# Altium PCB power1.pcbdoc
Units mm, origin at the board's own origin, x right, y up, seen from the top; angles counter-clockwise.
Board outline 82.27 x 51.69 mm, 2 copper layers (Top Layer, Bottom Layer); 6 components, 3 nets, 25 pads, 0 vias.
Unrouted connection lines stored in the file: 8.
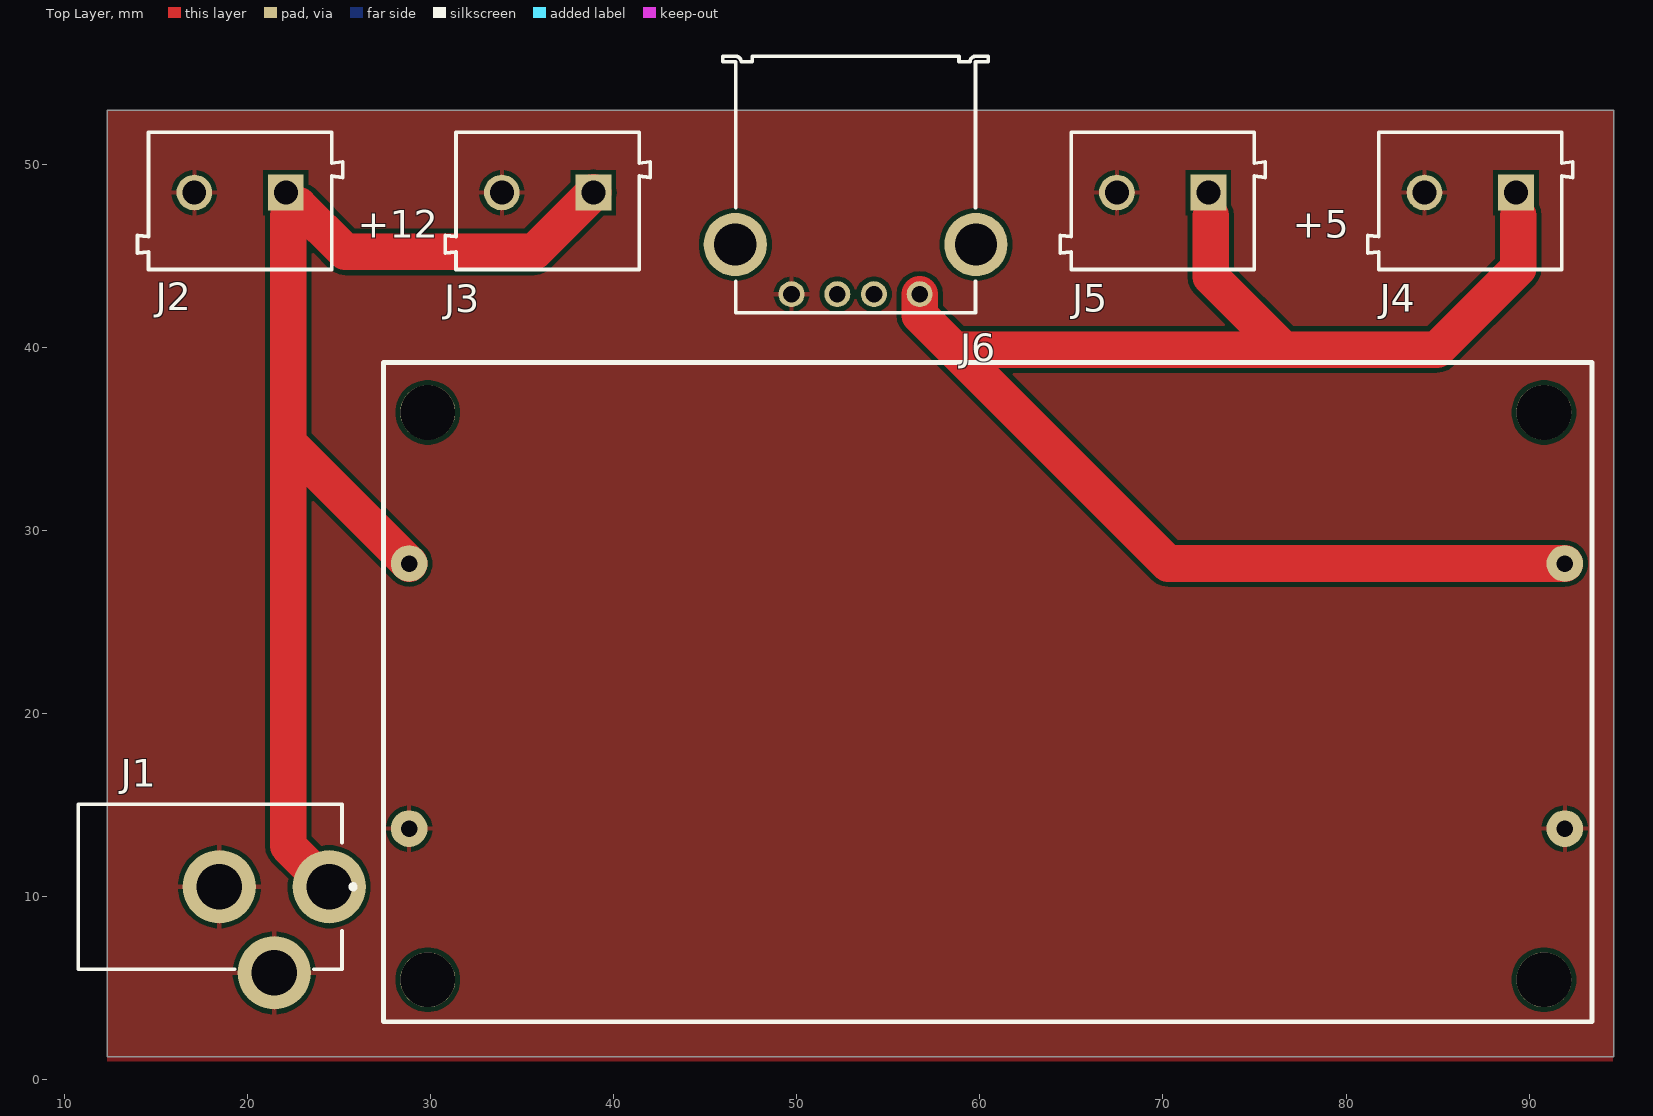
[diagram p0: Top Layer view]
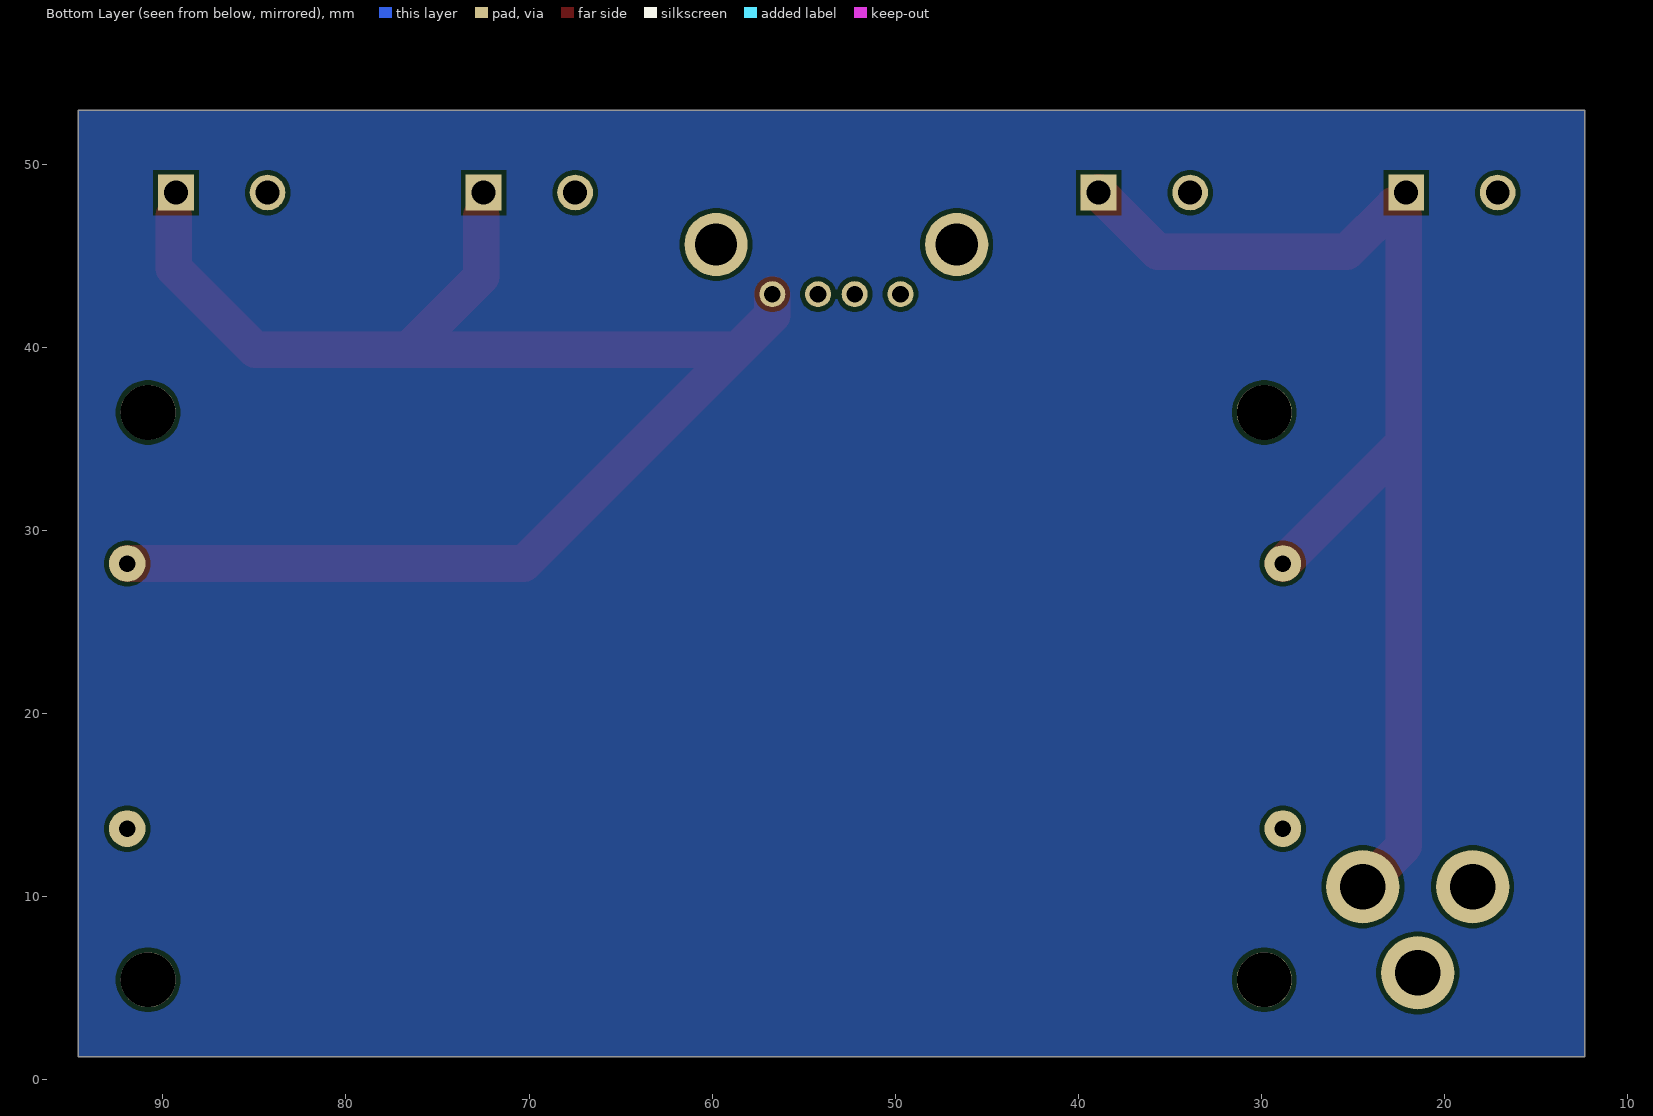
[diagram p1: Bottom Layer view, seen from below]
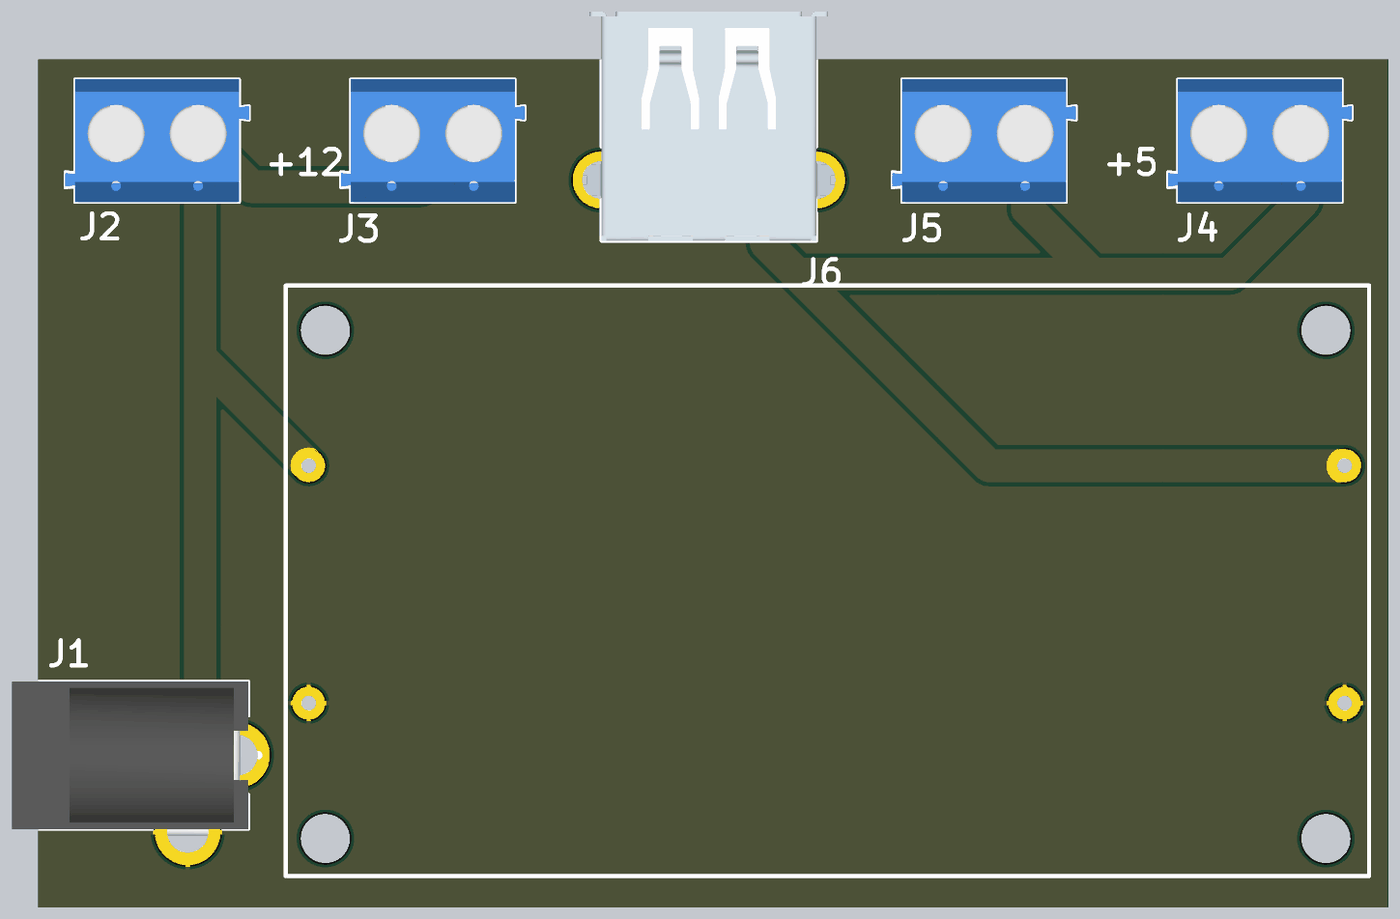
[diagram p2: 3D render of the assembled board from above, using the file's embedded part models]

## Layer stack, top to bottom
Top Solder: solder mask 0.0102, Solder Resist, Dk 3.5
Top Layer: signal copper 0.0356
Dielectric1: dielectric 0.32, FR-4, Dk 4.8
Bottom Layer: signal copper 0.0356
Bottom Solder: solder mask 0.0102, Solder Resist, Dk 3.5

## Board outline
12.349,52.959 94.615,52.959 94.615,1.27 12.349,1.27

## Design rules (kind name [scope] priority, off if disabled: settings)
Clearance [All] p1: gap=0.254 ignorepadtopadclearanceinfootprint=FALSE except(0: Arc-Hole Track-Hole SMDPad-Hole THPad-Hole Via-Hole Fill-Hole Poly-Hole Region-Hole Text-Hole)
PolygonConnect [All] p1: connectstyle=Relief reliefconductorwidth=0.254 reliefentries=4 polygonreliefangle="90 Angle" airgapwidth=0.254
RoutingVias [All] p1: holewidth=0.711 width=1.27 viastyle="Through Hole" minholewidth=0.711 minwidth=1.27 maxholewidth=0.711 maxwidth=1.27
SolderMaskExpansion [All] p1: expansion=0.102 istentingtop=FALSE
Width [All] p1: maxlimit=0.254 minlimit=0.254 preferedwidth=0.254
30 further rules are at their usual default settings.

## Components (designator, comment, footprint, x,y, rotation, side; value= is the part's Value field where it differs from the comment)
J1 "PJ-002A" CUI-PJ-002A_V 21.463,10.541 r180 top
J2 "691102710002" 691102710002 19.598,48.006 r180 top
J3 "691102710002" 691102710002 36.394,48.006 r180 top
J4 "691102710002" 691102710002 86.781,48.006 r180 top
J5 "691102710002" 691102710002 69.985,48.006 r180 top
J6 "61400416021" 61400416021 53.213,48.895 r180 top

## Footprints (in the part's own frame and the unit in brackets; to place one, negate y for a bottom-side part, rotate by r counter-clockwise, add the part's x,y. Pads: shape width x height; smd on the part's side, far side on the other; paste and mask are expansions set on the pad)
61400416021 [mm] "USB 2.0 Type A Horizontal"
  round 1.42 hole 0.92: 1(-3.5,5.99) 2(-1,5.99) 3(1,5.99) 4(3.5,5.99)
  round 3.45 hole 2.3: Shell(-6.57,3.28) Shell(6.57,3.28)
  silkscreen extent -7.25,-7 7.25,7, body extent -8,-7 8,7, height 7.63
691102710002 [mm] "5,00mm - modular - blue - Horizontal entry with pressure clamp - 9,9 mm height - 02p"
  rect 1.95x1.95 hole 1.3: 1(-2.5,-0.45)
  round 1.95 hole 1.3: 2(2.5,-0.45)
  silkscreen extent -5.6,-3.75 5.6,3.75, body extent -5.6,-3.75 5.6,3.75, height 9.96
CUI-PJ-002A_V [mm] "THD, 3-Leads, Body 14.4x9mm, Height 11mm"
  round 4 hole 2.5: 1(-3,0) 2(3,0) 3(0,4.7)
  silkscreen extent -4.43,-4.5 10.7,4.5, body extent -3.7,-4.5 10.7,4.9, height 11

## Part data
J1: library part CMP-2000-06895-2, "Through Hole Right Angle DC Power Jack, 2.5 A, 2 mm Center Pin, 3 Position, -25 to 85 degC, RoHS, Bulk", Current Rating=2.5A, Flammability Rating=UL94V-0, Insulation Resistance=50MOhms, Manufacturer=CUIInc., Operating Temperature Range=-25Cto+85C, Package Description="3-Pin Through Hole Device, Body 14.4 x 9 mm, Height 11 mm", Voltage Rating=24V, Brand=CUI, Connector Type=DCPowerJack, Contact Gender=Male, Contact Material=Copper, Contact Plating=Nickel, Datasheet URL=http://www.cui.com/product/resource/pj-002a.pdf, Datasheet Version="Rev. 1.03, 04/2016", Factory Pack Quantity=500, Housing Material=PolybutyleneTerephthalate(PBT), Inside Contact Diameter=2mm, Manufacturer URL=http://www.cui.com/, Mounting Angle=Right, Mounting Style=ThroughHole, Mounting Technology=ThroughHole, Outside Contact Diameter=6.5mm, Package Reference=PJ-002A, Product=Jacks, Product Category=DCPowerConnectors, RoHS=True, Termination Style=ThroughHole
J2 J3 J4 J5: library part CMP-1502-03258-1, "Series 102 - 5.00 mm Horizontal Entry Modular with Pressure Clamp WR-TBL, 2 pin", Manufacturer="Wurth Elektronik", Operating temperature=-40to105degC, Datasheet URL=http://katalog.we-online.de/em/datasheet/6911027100xx.pdf, Manufacturer URL=http://www.we-online.de, Mounting Technology=THT, Package Reference=691102710002, Packaging=Box, Part Number=691102710002, Pin Number=2, Pitch=5.00mm, Publisher=WurthElektronik
J6: library part CMP-1502-03227-1, "USB 2.0 Type A Receptacle WR-COM, Horizontal, THT", Contact Resistance=20mOhm, Manufacturer="Wurth Elektronik", Operating temperature=-40to105degC, Rated Current=1.5A, Working Voltage=30VAC, Connector Type=USB2.0TypeA, Datasheet URL=https://katalog.we-online.de/em/datasheet/61400416021.pdf, Gender=Receptacle, Manufacturer URL=http://www.we-online.de, Mounting Technology=THT, Orientation=Horizontal, Package Reference=61400416021, Packaging=Tray, Part Number=61400416021, Publisher=WurthElektronik

## Free pads (board coordinates)
  round 2 hole 0.9 unplated: ""(28.829,13.716) ""(28.829,28.194) ""(91.948,13.716) ""(91.948,28.194)
  round 3 hole 3 unplated: ""(29.845,5.461) ""(29.845,36.449) ""(90.805,5.461) ""(90.805,36.449)

## Nets (pads, with @x,y where several pads share a name; then routed paths per layer and width w, separated by ;. In a path a pad name is that pad's centre, name@x,y a point inside that pad or via, vN(x,y) a via of type N, cw(c..) or ccw(c..) an arc to the next point about the centre after c; other vN are vias at no path point)
+5: J4.1 J5.1 J6.1 pad.@91.948,28.194 | length 86.5
  Top Layer w2: J6.1 56.713,41.762 58.597,39.878 ; 72.612,47.186 72.612,43.847 76.581,39.878 ; 89.408,47.186 89.408,44.323 84.963,39.878 76.581,39.878 ; pad.@91.948,28.194 70.281,28.194 58.597,39.878 ; 58.597,39.878 76.581,39.878
+12: J1.1 J2.1 J3.1 pad.@28.829,28.194 | length 66.4
  Top Layer w0.254: J2.1 J2.1@22.796,47.758
  Top Layer w2: 22.225,47.186 22.225,34.798 ; J2.1@22.796,47.758 25.342,45.212 35.65,45.212 J3.1 ; J1.1 22.225,12.779 22.225,34.798 ; pad.@28.829,28.194 22.225,34.798
GND: J1.2 J1.3 J2.2 J3.2 J4.2 J5.2 J6.4 pad.@28.829,13.716 pad.@91.948,13.716
pads on no net: J6.2 J6.3 J6.Shell

## Polygon pours and split planes (outlines as drawn)
no net on Bottom Layer "NONET_L02_P001" (solid, pour order 1): 12.349,52.959 94.615,52.959 94.615,1.27 12.349,1.27
GND on Top Layer "GND_L01_P000" (solid, pour order 0): 12.349,52.959 94.551,52.959 94.551,1.016 12.349,1.016

## Silkscreen, mask and mechanical layers (free items; w line width, h text height)
Top Overlay:
  lines w0.254: 27.432,3.175 93.432,3.175 93.432,39.175 27.432,39.175 27.432,3.175
  text "+12" at 26.035,45.974 h1.52
  text "+5" at 77.089,45.974 h1.52

## Text inside footprints (layer, text, board x,y; h text height)
J6: Mechanical 2 "PCB Edge" at 55.413,57.115 h0.81 r180